# Altium PCB ASURT_LATCH_PCB.PcbDoc
Units mm, origin at the board's own origin, x right, y up, seen from the top; angles counter-clockwise.
Board outline 62.95 x 72.9 mm, 2 copper layers (Top Layer, Bottom Layer); 62 components, 49 nets, 220 pads, 83 vias.
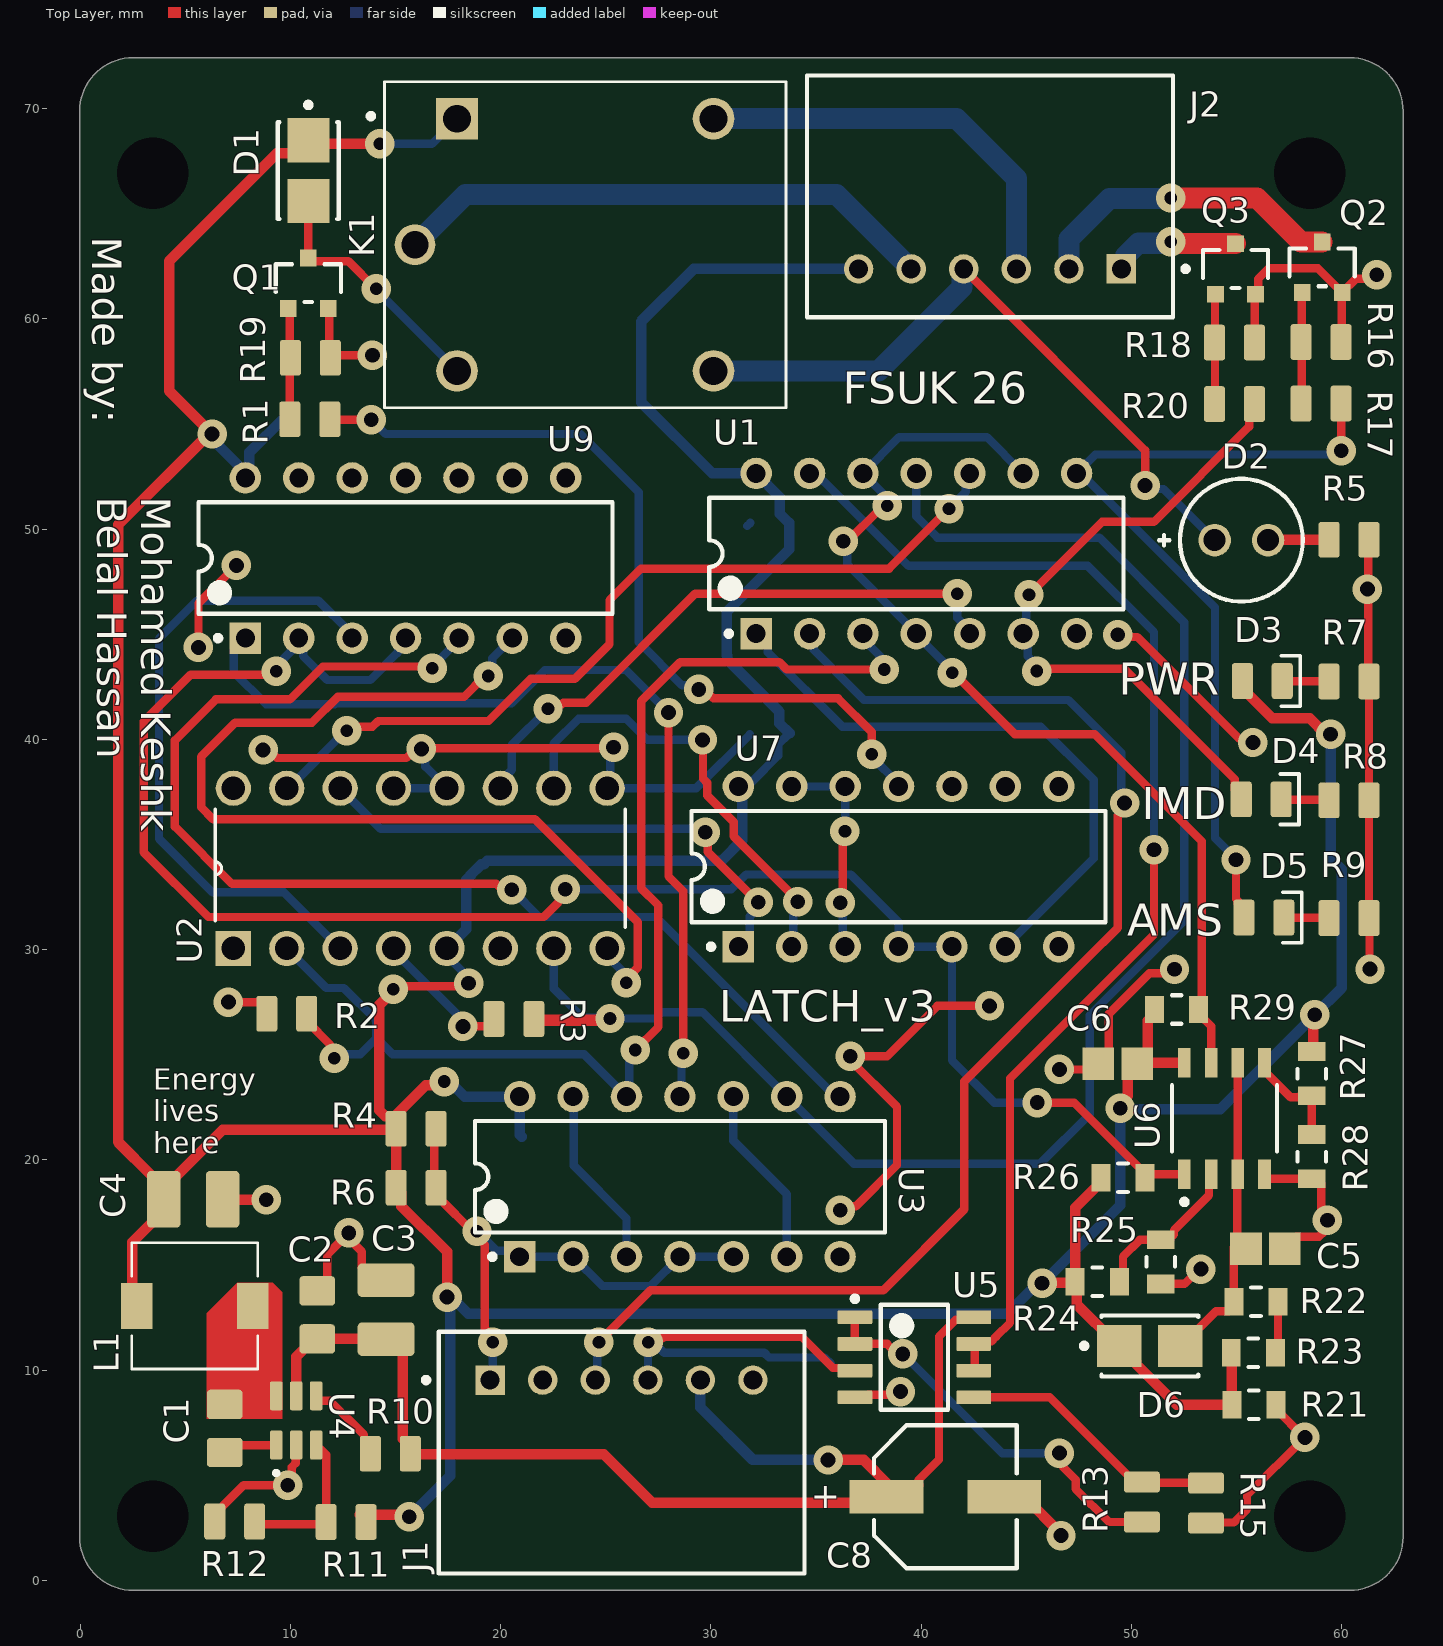
[diagram p0: Top Layer view]
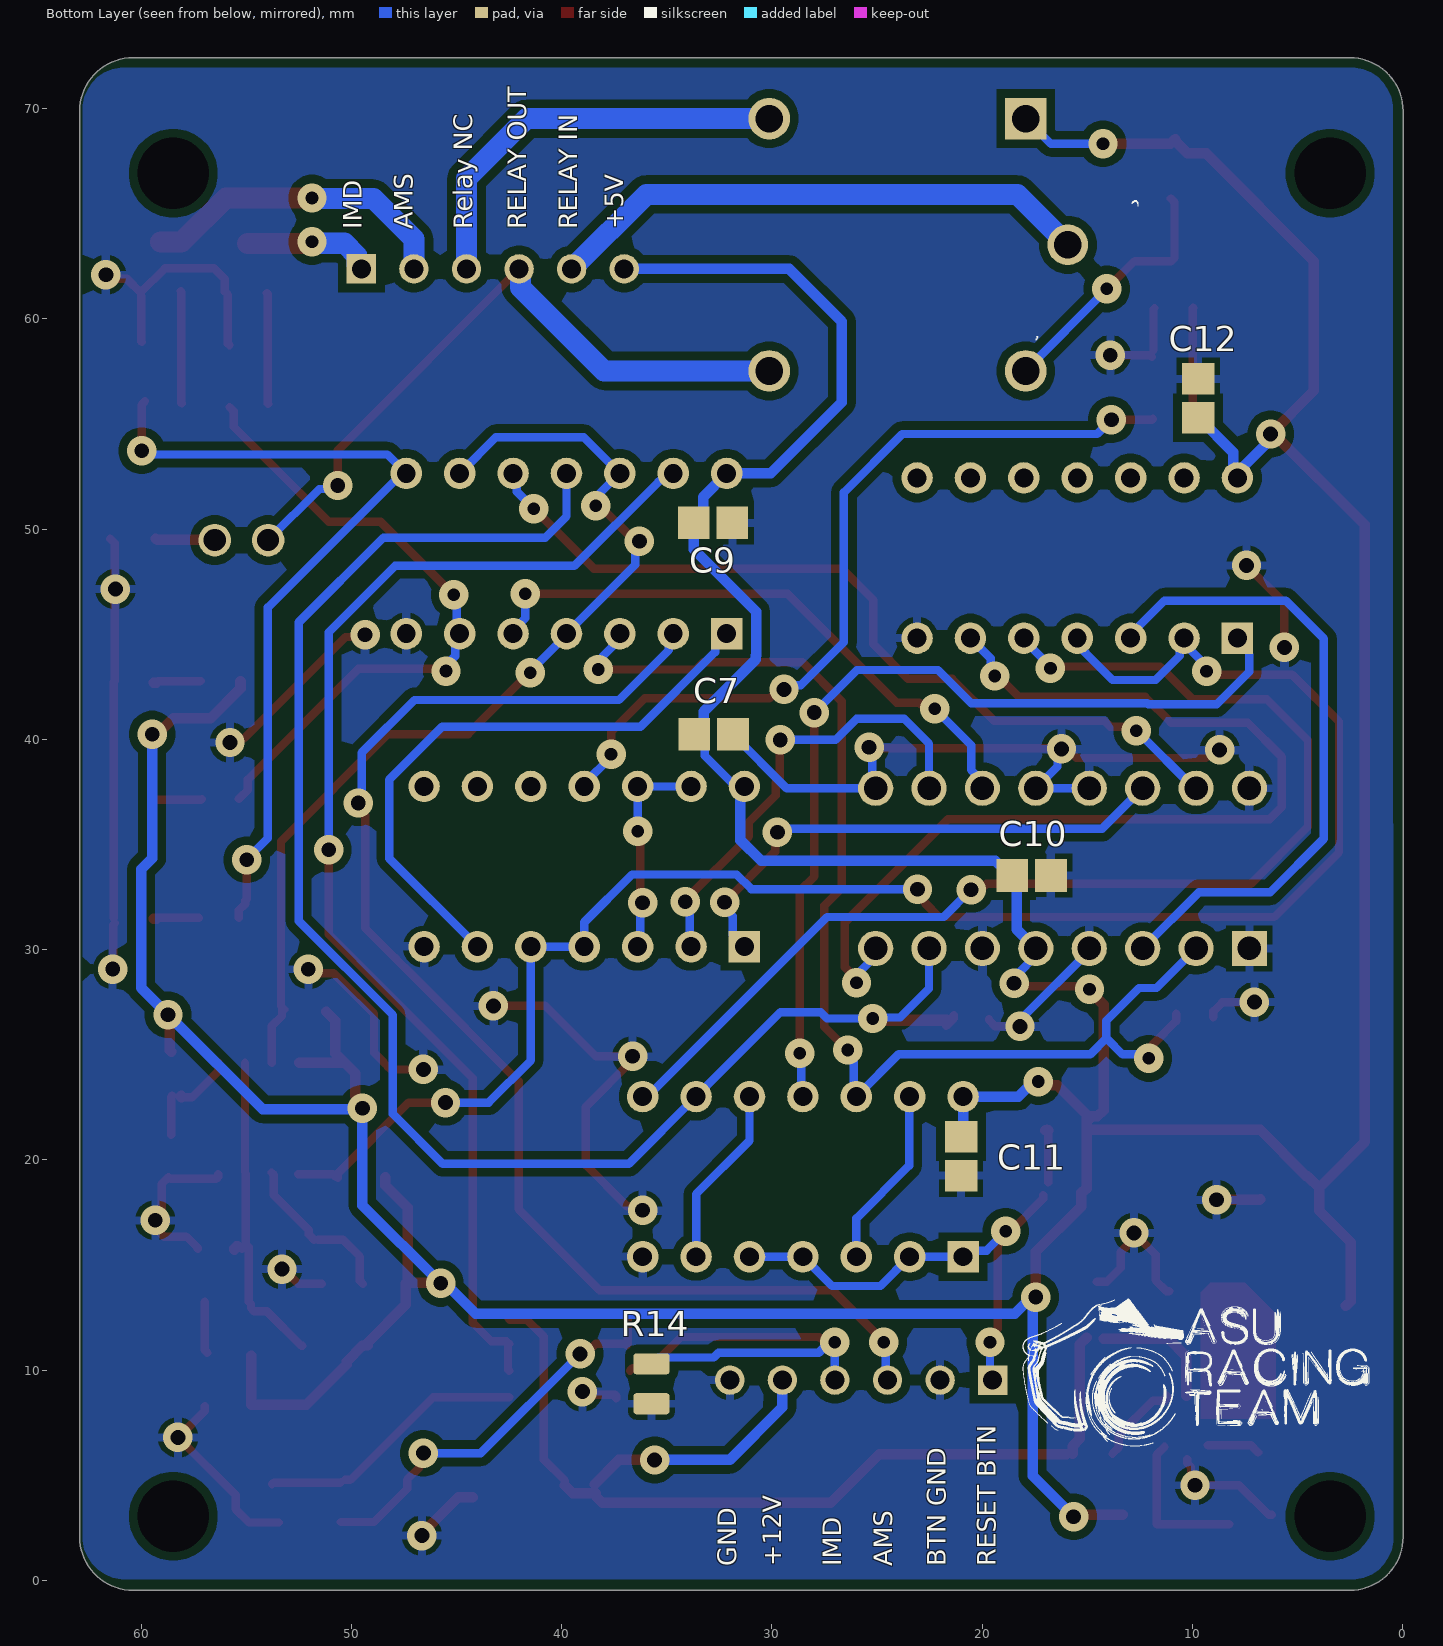
[diagram p1: Bottom Layer view, seen from below]
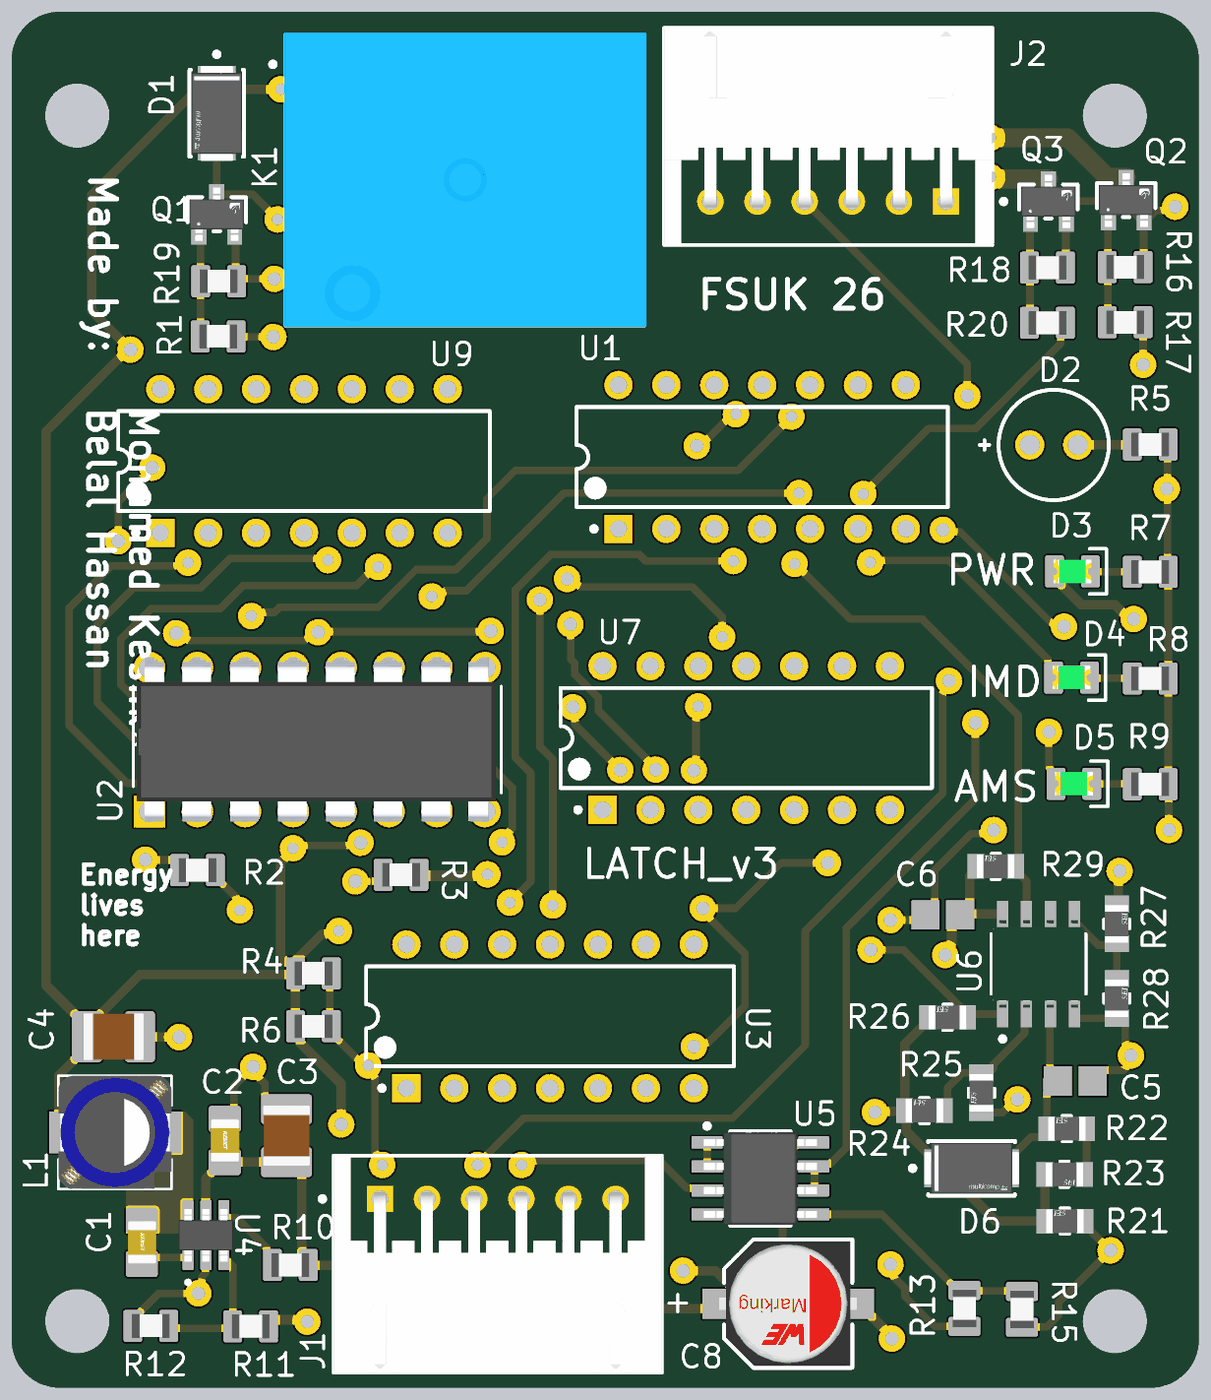
[diagram p2: 3D render of the assembled board from above, using the file's embedded part models]

## Layer stack, top to bottom
Top Solder: solder mask 0.0102, Solder Resist, Dk 3.5
Top Layer: signal copper 0.0356
Dielectric 1: dielectric 0.32, FR-4, Dk 4.8
Bottom Layer: signal copper 0.0356
Bottom Solder: solder mask 0.0102, Solder Resist, Dk 3.5

## Board outline
-0.025,2.065 -0.025,69.885 cw(c2.515,69.885) 2.515,72.425 60.385,72.425 cw(c60.385,69.885) 62.925,69.885 62.925,2.065 cw(c60.385,2.065) 60.385,-0.475 2.515,-0.475 cw(c2.515,2.065)

## Design rules (kind name [scope] priority, off if disabled: settings)
Clearance "Stitching GND" [IsStitchingVia and InNet('GND') vs (IsVia and (Not IsStitchingVia)) Or IsPad] p1: gap=0.127 ignorepadtopadclearanceinfootprint=FALSE
Clearance [All] p2: gap=0.4 ignorepadtopadclearanceinfootprint=TRUE except(0.2: Arc-Region Arc-Text Track-Region Track-Text SMDPad-Region SMDPad-Text THPad-Region THPad-Text Via-Region Via-Text Fill-Region Fill-Text Poly-Region Poly-Text Region-Region Region-Text Text-Text)
HoleSize [All] p1: absolutevalues=TRUE maxlimit=5 minlimit=0.025 maxpercent=80.000 minpercent=20.000
PlaneConnect [All] p1: planeconnectstyle=Relief reliefexpansion=0.508 reliefentries=4 reliefconductorwidth=0.4 reliefairgap=0.254
PolygonConnect [All] p1: connectstyle=Relief reliefconductorwidth=0.4 reliefentries=4 polygonreliefangle="90 Angle" airgapwidth=0.254
RoutingVias [All] p1: holewidth=0.6 width=1.4 viastyle="Through Hole" minholewidth=0.6 minwidth=1.4 maxholewidth=6.3 maxwidth=2
SolderMaskExpansion [All] p1: expansion=0.102 istentingtop=FALSE
SupplyNets "Schematic Supply Nets_3" [InNet('+5V')] p1: voltage=0.000
SupplyNets "Schematic Supply Nets" [InNet('GND')] p2: voltage=0.000
Width [All] p1: maxlimit=1 minlimit=0.4 preferedwidth=0.5 minimp=50.000000 maximp=50.000000 favimp=50.000000
28 further rules are at their usual default settings.

## Components (designator, comment, footprint, x,y, rotation, side; value= is the part's Value field where it differs from the comment)
C1 "22nF" CAP_0805 6.875,7.225 r270 top
C2 "0.1uF" CAP_0805 11.275,12.625 r270 top
C3 "22uF" CAP_1210 14.55,12.875 r270 top
C4 "22uF" CAP_1210 5.375,18.125 r180 top
C5 "22uF" CAPC2013X145X48ML20T23 56.375,15.775 r180 top
C6 "100n" CAPC2013X145X48ML20T23 49.35,24.575 r180 top
C7 "100n" CAPC2013X145X48ML20T23 32.775,40.25 r180 bottom
C8 "865080343009" WCAP-ASLI_D6.3H5.5 41.15,3.975 r180 top
C9 "100n" CAPC2013X145X48ML20T23 32.8,50.3 r180 bottom
C10 "100n" CAPC2013X145X48ML20T23 17.65,33.525 r0 bottom
C11 "100n" CAPC2013X145X48ML20T23 21,20.175 r270 bottom
C12 "100n" CAPC2013X145X48ML20T23 9.725,56.225 r90 bottom
D1 "1N4007 SMD" FP-1N4007_SMD-IPC_C 10.85,67.05 r270 top
D2 "HLMP-4740" AVAG-HLMP-4740 55.23,49.475 r0 top
D3 "GREEN" LED_0805_GREEN 56.225,42.775 r180 top
D4 "GREEN" LED_0805_GREEN 56.175,37.15 r180 top
D5 "GREEN" LED_0805_GREEN 56.3,31.525 r180 top
D6 "1N4007 SMD" FP-1N4007_SMD-IPC_C 50.875,11.15 r0 top
J1 "S6B-XH-A (LF)(SN)" FP-S6B-XH-A_LF_SN-MFG 25.75,6.075 r180 top
J2 "S6B-XH-A (LF)(SN)" FP-S6B-XH-A_LF_SN-MFG 43.275,65.825 r0 top
K1 "SRD-05VDC-SL-C" RELAY_SRD-05VDC-SL-C 24.025,63.525 r0 top
L1 "10uH" "PCBComponent_1 - duplicate1" 0.37,13.939 r180 top
Q1 "AO3400A" FP-SOT23-MFG 10.85,61.7 r90 top
Q2 "AO3400A" FP-SOT23-MFG 59.075,62.45 r90 top
Q3 "AO3400A" FP-SOT23-MFG 54.95,62.375 r90 top
R1 "100" RES_0805 10.925,55.225 r180 top
R2 "47K" RES_0805 9.825,26.95 r0 top
R3 "47K" RES_0805 20.625,26.7 r180 top
R4 "10K" RES_0805 15.975,21.475 r0 top
R5 "470" RES_0805 60.35,49.5 r180 top
R6 "10K" RES_0805 15.975,18.675 r0 top
R7 "470" RES_0805 60.35,42.75 r180 top
R8 "220" RES_0805 60.35,37.1 r180 top
R9 "220" RES_0805 60.35,31.5 r180 top
R10 "10k" RES_0805 14.75,6.025 r0 top
R11 "110k" RES_0805 12.65,2.775 r180 top
R12 "15k" RES_0805 7.35,2.8 r180 top
R13 "10k" RES_0805 50.5,3.725 r270 top
R14 "2.2k" RES_0805 35.725,9.35 r90 bottom
R15 "10k" RES_0805 53.55,3.675 r90 top
R16 "10k" RES_0805 59.025,58.9 r180 top
R17 "100" RES_0805 59.025,55.975 r180 top
R18 "10k" RES_0805 54.9,58.875 r180 top
R19 "10k" RES_0805 10.95,58.15 r180 top
R20 "100" RES_0805 54.9,55.95 r180 top
R21 "10k" FP-RMCF0805-MFG 55.825,8.35 r180 top
R22 "43k" FP-RMCF0805-MFG 55.925,13.25 r180 top
R23 "110k" FP-RMCF0805-MFG 55.8,10.825 r0 top
R24 "15k" FP-RMCF0805-MFG 48.375,14.2 r180 top
R25 "3k" FP-RMCF0805-MFG 51.4,15.15 r270 top
R26 "10k" FP-RMCF0805-MFG 49.6,19.15 r180 top
R27 "110k" FP-RMCF0805-MFG 58.575,24.1 r90 top
R28 "110k" FP-RMCF0805-MFG 58.575,20.15 r90 top
R29 "10k" FP-RMCF0805-MFG 52.15,27.15 r180 top
U1 "SN74HC32" N0014A 39.77,48.84 r90 top
U2 "M74HC76" PCBComponent_1 22.859,41.758 r0 top
U3 "74HC00N" NXP-SOT27-1-14 28.525,19.2 r90 top
U4 "" "PCBComponent_1 - duplicate" 9.767,17.384 r90 top
U5 "TLV2372IDR" D0008A_M 39.675,10.61 r0 top
U6 "LM393D" FP-SO8-MFG 54.425,21.975 r90 top
U7 "74HC00N" N0014A 38.925,33.95 r90 top
U9 "SN74HC08N" N0014A 15.475,48.625 r90 top

## Footprints (in the part's own frame and the unit in brackets; to place one, negate y for a bottom-side part, rotate by r counter-clockwise, add the part's x,y. Pads: shape width x height; smd on the part's side, far side on the other; paste and mask are expansions set on the pad)
AVAG-HLMP-4740 [mm] "THD, 2-Leads, Dia 5.845mm, Pitch 2.54mm"
  round 1.55 hole 1.05: 1(-1.27,0) 2(1.27,0)
  silkscreen extent -3.92,-2.92 2.92,2.92
CAP_0805 [mm]
  rrect25% 1.4x1.7 smd: 1(-1.143,0) 2(1.143,0)
  body extent -1.15,-0.76 1.15,0.79, height 1.01
CAP_1210 [mm]
  rrect25% 1.6x2.7 smd: 1(-1.4,0) 2(1.4,0)
  body extent -1.6,-1.25 1.6,1.25, height 2.5
CAPC2013X145X48ML20T23 [mm] "Chip Capacitor, 2-Leads, Body 2.00x1.25mm, IPC Low Density"
  rect 1.5x1.55 smd: 1(-0.925,0) 2(0.925,0)
  body extent -1.1,-0.72 1.1,0.72, height 1.45
D0008A_M [mm] "SOIC, 8-Leads, Body 5x4mm, Pitch 1.27mm, IPC Low Density"
  rrect15% 1.65x0.65 smd: 1(-2.825,1.905) 2(-2.825,0.635) 3(-2.825,-0.635) 4(-2.825,-1.905) 5(2.825,-1.905) 6(2.825,-0.635) 7(2.825,0.635) 8(2.825,1.905)
  silkscreen extent -2.95,-2.5 1.6,2.9, body extent -3,-2.45 3,2.45, height 1.63
FP-1N4007_SMD-IPC_C [mm]
  rect 2.1x2 smd paste+0 mask+0: 1(-1.45,0) 2(1.45,0)
  silkscreen extent -3.25,-1.45 2.3,1.45, body extent -2.6,-1.55 2.6,1.55, height 0.25
FP-RMCF0805-MFG [mm]
  rect 0.9x1.3 smd paste+0 mask+0: 1(-1.05,0) 2(1.05,0)
  silkscreen extent -0.23,-0.67 0.23,0.67, body extent -1.6,-0.77 1.6,0.77, height 0.25
FP-S6B-XH-A_LF_SN-MFG [mm]
  rect 1.4x1.4 hole 0.9 paste-2539.97 mask+0: 1(6.25,-3.45)
  round 1.4 hole 0.9 paste-2539.97 mask+0: 2(3.75,-3.45) 3(1.25,-3.45) 4(-1.25,-3.45) 5(-3.75,-3.45) 6(-6.25,-3.45)
  silkscreen extent -8.7,-5.75 9.42,5.75, body extent -8.8,-5.85 8.8,5.85, height 0.25
FP-SO8-MFG [mm]
  rect 1.4x0.6 smd paste+0 mask+0: 1(-2.65,1.905) 2(-2.65,0.635) 3(-2.65,-0.635) 4(-2.65,-1.905) 5(2.65,-1.905) 6(2.65,-0.635) 7(2.65,0.635) 8(2.65,1.905)
  silkscreen extent -4.1,-2.5 1.58,2.5, body extent -3.45,-2.6 3.45,2.6, height 0.25
FP-SOT23-MFG [mm]
  rect 0.8x0.8 smd paste+0 mask+0: 1(-1.2,0.95) 2(-1.2,-0.95) 3(1.2,0)
  silkscreen extent -0.9,-1.55 0.9,1.55, body extent -1.7,-1.78 1.7,1.78, height 0.25
LED_0805_GREEN [mm]
  rrect25% 1x1.7 smd: A(0.95,0) K(-0.95,0)
  silkscreen extent -1.8,-1.2 -0.9,1.2, body extent -1,-0.63 1,0.63, height 1.12
N0014A [mm] "DIP, 14-Leads, Body 19.7x6.6mm, Pitch 2.54mm"
  rect 1.5x1.5 hole 0.9: 1(-3.81,7.62)
  round 1.5 hole 0.9: 2(-3.81,5.08) 3(-3.81,2.54) 4(-3.81,0) 5(-3.81,-2.54) 6(-3.81,-5.08) 7(-3.81,-7.62) 8(3.81,-7.62) 9(3.81,-5.08) 10(3.81,-2.54) 11(3.81,0) 12(3.81,2.54) 13(3.81,5.08) 14(3.81,7.62)
  silkscreen extent -3.93,-9.85 2.65,9.85, body extent -3.95,-9.85 3.95,9.85, height 5.08
NXP-SOT27-1-14 [mm] "DIP, 14-Leads, Body 19.5x6.5mm, Pitch 2.54mm"
  rect 1.5x1.5 hole 0.9: 1(-3.81,7.62)
  round 1.5 hole 0.9: 2(-3.81,5.08) 3(-3.81,2.54) 4(-3.81,0) 5(-3.81,-2.54) 6(-3.81,-5.08) 7(-3.81,-7.62) 8(3.81,-7.62) 9(3.81,-5.08) 10(3.81,-2.54) 11(3.81,0) 12(3.81,2.54) 13(3.81,5.08) 14(3.81,7.62)
  silkscreen extent -3.93,-9.75 2.65,9.75, body extent -3.95,-9.75 3.95,9.75, height 4.2
PCBComponent_1 [mil]
  rect 66x66 hole 44: 1(-613.16,-460.74)
  round 66 hole 44: 2(-513.16,-460.74) 3(-413.16,-460.74) 4(-313.16,-460.74) 5(-213.16,-460.74) 6(-113.16,-460.74) 7(-13.16,-460.74) 8(86.84,-460.74) 9(86.84,-160.74) 10(-13.16,-160.74) 11(-113.16,-160.74) 12(-213.16,-160.74) 13(-313.16,-160.74) 14(-413.16,-160.74) 15(-513.16,-160.74) 16(-613.16,-160.74)
  silkscreen extent -647,-422 121,-200, body extent -640,-501 110,-129, height 146
"PCBComponent_1 - duplicate" [mm]
  rrect25% 1.37x0.59 smd: 1(-10.949,0.442) 2(-10.949,-0.508) 3(-10.949,-1.458) 4(-8.609,-1.458) 5(-8.609,-0.508) 6(-8.609,0.442)
  silkscreen extent -12.38,0.34 -12.18,0.54, body extent -11.18,-1.97 -8.38,0.95, height 1.4
"PCBComponent_1 - duplicate1" [mm]
  rect 1.5x2.2 smd: 1(-7.83,0.889) 2(-2.33,0.889)
  silkscreen extent -8.08,-2.11 -2.08,3.89, body extent -8.08,-2.11 -2.08,3.89, height 3
RELAY_SRD-05VDC-SL-C [mm]
  rect 1.98x1.98 / inner round 1.98 / far side rect 1.98x1.98 hole 1.32: A1(-6.1,6)
  round 1.98 hole 1.32: A2(-6.1,-6) NC(6.1,6) NO(6.1,-6)
  round 1.935 hole 1.29: COM(-8.1,0)
  silkscreen extent -10.3,-7.75 9.55,7.75, body extent -9.6,-7.8 9.6,7.8, height 15.8
RES_0805 [mm]
  rrect25% 1x1.7 smd: 1(-0.95,0) 2(0.95,0)
  body extent -1,-0.63 1,0.63, height 0.47
WCAP-ASLI_D6.3H5.5 [mm] "Aluminium Electrolytic V-Chip SMT Capacitors, 6.3x5.5mm"
  rect 3.5x1.6 smd: 1(2.8,0) 2(-2.8,0)
  silkscreen extent -3.4,-3.4 3.4,3.4, body extent -3.65,-3.3 3.65,3.3, height 5.5

## Part data
C1 C2: library part CAP_0805, "Capacitor SMD 0805"
C3 C4: library part CAP_1210, "Capacitor SMD 1210"
C5 C6 C7 C9 C10 C11 C12: library part CMP-2007-03205-1, Manufacturer=Vitramon, Part Number=VJ0805Y682KXAMT
C8: library part CMP-03913-53914574-2, "Alum. Electrolytic Cap 100UF 16V 6.3MMV-CHIP Wcap-asli, Lifetime 2000H +105OC", Capacitance=100µF, Case/Package=Radial, ESR (Equivalent Series Resistance)=399.422mΩ, Insulation Resistance=1MΩ, Leakage Current=16µA, Max Operating Temperature=105°C, Min Operating Temperature=-55°C, Ripple Current=255mA, Tolerance=20%, Voltage Rating=16V, Diameter=6.3mm, Height=5.5mm, Height - Seated (Max)=5.5118mm, Impedance=520mΩ, Lead Free="Lead Free", Length=5.5mm, Life (Hours)=2000hours, Mount="Surface Mount", Polarity=Polar, REACH SVHC=Unknown, Ripple Current (AC)=255mA, RoHS=Compliant, Voltage Rating (DC)=16V, Width=6.6mm
D1 D6: library part CMP-12389-000001-1, "Rectifier, 1Kv, 1A, Do-214Ac Rohs Compliant: Yes"
D2: library part CMP-2000-06413-1, "T-1 3/4 (5 mm) Low Current LED Lamp, Green, 1.9 V, -20 to 100 degC, 2-Pin THD, RoHS, Bulk", Color=Green, Dominant Wavelength/Color Temperature=569nm, Manufacturer=AvagoTechnologies, Package=2T-13/4, Package Description="2-Pin Through Hole Device, Dia 5.845 mm, Pitch 2.54 mm", Category=LEDs, Datasheet URL=http://docs.avagotech.com/docs/AV02-1557EN, Datasheet Version=07/2014, Intensity=2.3mcd, Lens Appearance=ColoredDiffused, Lens Shape Type=Circular, Manufacturer URL=http://www.avagotech.com/, Mounting=ThroughHole, Mounting Orientation=TopMount, Mounting Technology=ThroughHole, Number of LEDs=1, Package Reference=HLMP-4740, Packaging=Bulk, Peak Wavelength=565nm, Pin Count=2, Rad Hard=No, Type=Uni-Color, Viewing Angle=50°
D3 D4 D5: library part LED_0805_GREEN, "LED 0805 GREEN SMD"
J1 J2: library part CMP-17439-000165-2, "CONN HEADER R/A 6POS 2.5MM", Color=Natural, Contact Resistance=20mR, Current Rating=3A, Flammability Rating="UL94 V-0", Housing Color=White, Insulation Resistance=1GR, Max Operating Temperature=85°C, Max Voltage Rating (AC)=250V, Min Operating Temperature=-25°C, Package Quantity=500, Connector Type=Header, Contact Finish - Mating=TIN, Contact Material=Brass, Contact Plating=Tin, Contact Shape=Square, Contact Type="Male Pin", Depth=11.5mm, Fastening Type=Detent, Gender=Male, Housing Material=Polyamide, Insulation Color=Natural, Insulation Material=Nylon, Lead Free="Lead Free", Lead Pitch=2.5mm, Length=17.4mm, Max Current Rating=3A, Mount="Through Hole", Number of Contacts=6, Number of Positions=6, Number of Rows=1, Orientation="Right Angle", Packaging=Bulk, Pitch=2.5mm, REACH SVHC="No SVHC", Series=XH, Termination=Solder, Voltage Rating=250V, Voltage Rating (AC)=250V, Wire/Cable Gauge=22AWG
K1: "5V Trigger Relay Module For Arduino And Raspberry Pi 5V Trigger Relay Module For Arduino And Raspberry Pi", Package="NON STANDARD-5 Songle Relay", Availability="Not in stock", Check_prices=https://www.snapeda.com/parts/SRD-05VDC-SL-C/Songle+Relay/view-part/?ref=eda, MF="Songle Relay", MP=SRD-05VDC-SL-C, Price=None, SnapEDA_Link=https://www.snapeda.com/parts/SRD-05VDC-SL-C/Songle+Relay/view-part/?ref=snap
L1: library part "10uH INDUCTOR"
Q1 Q2 Q3: library part CMP-83955-000006-1, "MOSFET N-CH 30V 5.7A SOT23", Case/Package=SOT-23, Continuous Drain Current (ID)=5.7A, Drain to Source Voltage (Vdss)=30V, Gate to Source Voltage (Vgs)=12V, Input Capacitance=630pF, Max Operating Temperature=150°C, Max Power Dissipation=1.4W, Min Operating Temperature=-55°C, Lead Free="Lead Free", Mount="Surface Mount", Number of Elements=1, Number of Pins=3, Packaging="Tape and Reel", Power Dissipation=1.4W, Radiation Hardening=No, Rds On Max=26.5mR
R1 R2 R3 R4 R5 R6 R7 R8 R9 R10 R11 R12 R13 R14 R15 R16 R17 R18 R19 R20: library part RES_0805, "Resistor SMD 0805"
R21 R22 R23 R24 R25 R26 R27 R28 R29: library part CMP-26527-003091-1, "33kΩ ±5% 0.125W 0805 Thick Film Chip Resistor AEC-Q200 compliant", Case/Package=0805, Max Operating Temperature=155°C, Max Power Dissipation=125mW, Min Operating Temperature=-55°C, Package Quantity=10000, Resistance=33kR, Resistor Type="Thick Film", Temperature Coefficient=200ppm/°C, Tolerance=5%, Contact Plating=Tin, Features="Automotive AEC-Q200", Height=0.026inch, Length=0.079inch, Mount="Surface Mount", Number of Terminations=2, Packaging="Tape and Reel", Radiation Hardening=No, RoHS Compliant=Yes, Series=RMCF, Width=0.049inch
U1: library part CMP-1573-00140-3, "Quad 2-input positive-OR gates, N0014A, TUBE", F @ Nom Voltage(Max)(Mhz)=100, Generic Part Number=SN7432, ICC @ Nom Voltage(Max)(mA)=0.038, Manufacturer="Texas Instruments", Operating Temperature Range(C)="0 to 70", Rating=Catalog, tpd @ Nom Voltage(Max)(ns)=22, Voltage(Nom)(V)=5, Bits(#)=4, Code_JEDEC=MS-001, DatasheetVersion=SDLS100, Input Type=TTL, Output Drive (IOL/IOH)(Max)(mA)=0.8/-16, Output Type=TTL, PackageReference=N0014A, PackageVersion=http://www.ti.com/lit/ml/mpdi002c/mpdi002c.pdf, VCC(Max)(V)=5.25, VCC(Min)(V)=4.75
U2: "dual J-K flip-flop with preset and clear"
U3: library part CMP-0976-00001-1, "Quad 2-input NAND gate, CMOS, 2 to 6 V, -40 to 125 degC, 14-Pin DIP (SOT27-1), RoHS, Bulk", Manufacturer="NXP Semiconductors", Temperature Range="-40 to 125 degC", ComponentLink1Description="Manufacturer URL", ComponentLink1URL=http://www.nxp.com/, ComponentLink2Description=Datasheet, ComponentLink2URL=http://www.nxp.com/documents/data_sheet/74HC_HCT00.pdf, ComponentLink3Description="Package Specification", ComponentLink3URL=http://www.nxp.com/documents/outline_drawing/sot027-1_po.pdf, DatasheetVersion="Rev. 6", fmax (MHz)=36, Input levels=CMOS, Mounting Technology="Through Hole", Nr of bits=4, Output drive capability (mA)="+/- 5.2", PackageDescription="14-Pin plastic dual in-line package, Body 19.025 x 6.34 mm, Pitch 2.54 mm", PackageReference=SOT27-1, PackageVersion=Feb-03, Packing=Bulk, PartNumber=74HC00N, RoHS=TRUE, tpd (ns)=7, VCC (V)="2 to 6"
U4: library part MT2492, "DC-DC step-down converter (buck converter)"
U5: library part CMP-0272-02948-3, "550 uA/Ch, 3 MHz, RRIO Operational Amplifier, 2.7 to 16 V, -40 to 125 degC, 8-pin SOIC (D8), Green (RoHS & no Sb/Br)", Manufacturer="Texas Instruments", Rating=Catalog, Total Supply Voltage(Max)(+5V is 5, +/-5V is 10)=16, Total Supply Voltage(Min)(+5V is 5, +/-5V is 10)=2.7, CMRR(Min)(dB)=50, Code_JEDEC=MS-012, ComponentLink1Description="Manufacturer URL", ComponentLink1URL=http://www.ti.com/, ComponentLink2Description=Datasheet, ComponentLink2URL=http://www.ti.com/lit/ds/symlink/tlv2372.pdf, ComponentLink3Description="Package Specification", ComponentLink3URL=http://www.ti.com/litv/pdf/msoi002j, DatasheetVersion=SLOS270D, Eco-Plan="Green (RoHS & no Sb/Br)", GBW(Typ)(MHz)=3, IIB(Max)(pA)=60, Iq per channel(Max)(mA)=0.9, Mounting Technology="Surface Mount", Number of Channels=2, Offset Drift(Typ)(uV/C)=2, PackageDescription="8-Pin Plastic Small Outline, Body 4.9 x 3.9 mm, Pitch 1.27 mm", PackageReference=D0008A, PackageVersion="4040047-3/M, 06/2011", Packing="LARGE T&R", PartNumber=TLV2372IDR, Slew Rate(Typ)(V/us)=2.4, Sub Family="Low Supply Voltage Amplifier (<=2.7V), Precision Amplifier", Vio (25C)(Max)(mV)=4.5
U6: library part CMP-12132-000003-1, "IC VOLT COMPARATOR DUAL LP 8SOIC", Ambient Temperature Range High=+70°C, Ambient Temperature Range Low=0°C, Input Bias Current=0.02uA, Input Offset Voltage=1mV, Manufacturer=STMicroelectronics, Max Dual Supply Voltage=18V, Max Junction Temp=+150°C, Max Supply Voltage=36V, Min Dual Supply Voltage=1V, Min Supply Voltage=2V, Nominal Supply Current=0.45-0.6mA, Output Current Per Channel=18mA, Package=SO8, Temperature="0°C to +70°C", Voltage Gain=200V/mV, Automotive=No, Category=IC, ComponentLink2Description=Datasheet, ComponentLink2URL=https://www.st.com/resource/en/datasheet/lm393.pdf, Device Class L1="Integrated Circuits (ICs)", Device Class L2="Linear ICs", Device Class L3=Comparators, Digikey Description="IC VOLT COMPARATOR DUAL LP 8SOIC", Footprint Url=https://www.st.com/resource/en/datasheet/stm8l001j3.pdf, Height=1.75mm, Lead Free=Yes, Manufacturer Part Number=LM393D, Mouser Description="Analog Comparators Lo-Pwr Dual Voltage", Number of Channels=2, Octopart=https://octopart.com/lm393d-stmicroelectronics-25832, Response Time=1.3us, RoHS=TRUE, Standoff Height=0.1mm, Temperature Range High=+70°C, Temperature Range Low=0°C
U7: library part CMP-1627-00501-2, "Quad 2-input positive-NAND gates, N0014A, TUBE", F @ Nom Voltage(Max)(Mhz)=75, Generic Part Number=SN7400, ICC @ Nom Voltage(Max)(mA)=0.022, Manufacturer="Texas Instruments", Operating Temperature Range(C)="0 to 70", Rating=Catalog, tpd @ Nom Voltage(Max)(ns)=22, Voltage(Nom)(V)=5, Bits(#)=4, Code_JEDEC=MS-001, DatasheetVersion=SDLS025B, Input Type=TTL, Output Drive (IOL/IOH)(Max)(mA)=0.4/-16, Output Type=TTL, PackageReference=N0014A, Schmitt Trigger=No, Technology Family=TTL, VCC(Max)(V)=5.25, VCC(Min)(V)=4.75
U9: library part CMP-0777-00282-3, "Quad 2-input positive-AND gates, N0014A, TUBE", F @ Nom Voltage(Max)(Mhz)=50, Generic Part Number=SN74S08, ICC @ Nom Voltage(Max)(mA)=0.032, Manufacturer="Texas Instruments", Operating Temperature Range(C)="0 to 70", Rating=Catalog, tpd @ Nom Voltage(Max)(ns)=7.5, Voltage(Nom)(V)=5, Bits(#)=4, DatasheetVersion=SDLS033, Input Type=TTL, Output Drive (IOL/IOH)(Max)(mA)=-24/24, Output Type=TTL, PackageReference=N0014A, Schmitt Trigger=No, Technology Family=S, VCC(Max)(V)=5.25, VCC(Min)(V)=4.75

## Free pads (board coordinates)
  round 1.524 hole 3.4 unplated: 1(3.45,66.925) 2(58.475,66.925) 3(58.475,3.05) 4(3.45,3.05)

## Via types
v1: diameter 1.4, hole 0.7, Top Layer to Bottom Layer, 35 vias
v2: diameter 1.4, hole 0.6, Top Layer to Bottom Layer, 29 vias
v3: diameter 1.4, hole 0.711, Top Layer to Bottom Layer, 19 vias

## Nets (pads, with @x,y where several pads share a name; then routed paths per layer and width w, separated by ;. In a path a pad name is that pad's centre, name@x,y a point inside that pad or via, vN(x,y) a via of type N, cw(c..) or ccw(c..) an arc to the next point about the centre after c; other vN are vias at no path point)
+5V: C4.2 C6.1 C7.1 C9.1 C10.2 C11.1 C12.1 D1.1 D3.A D6.1 J2.6 K1.A1 L1.2 R4.1 R6.1 R11.1 R21.2 R23.1 R24.2 R26.2 R27.2 R29.2 U1.14 U2.5 U3.14 U6.8 U7.14 U9.14 | length 293.5
  Top Layer w0.4: v2@14.9,28.117 15.038,28.255 18.28,28.255 v3@18.5,28.475
  Top Layer w0.5: L1.2 2.475,13.275 2.475,16.075 3.975,17.575 C4.2@3.975,18.675 ; D1.1@10.825,68.55 11.05,68.325 v2(14.25,68.325) ; D1.1 10.218,67.868 9.343,67.868 4.225,62.75 4.225,56.575 v3(6.275,54.525) 6.125,54.525 1.8,50.2 1.8,20.85 3.425,19.225 C4.2@3.975,18.675 ; R11.1@13.3,3.125 15.294,3.125 15.5,2.919 v1@15.5,2.9 ; R4.1@14.862,21.987 14.775,22.075 14.518,22.075 14.225,22.368 14.225,27.368 14.894,28.036 v2(14.894,28.11) v2@14.9,28.117 ; R4.1@14.9,21.375 14.85,21.425 6.775,21.425 4.575,19.225 4.525,19.225 C4.2@3.975,18.675 ; R6.1@15.025,18.625 R4.1 15.025,21.891 15.025,22.15 16.428,23.553 17.153,23.553 v2(17.325,23.725) ; R6.1 15.275,18.425 15.275,17.8 17.45,15.625 v1(17.45,13.475) ; v1(45.75,14.125) 45.788,14.162 47.237,14.162 R24.2@47.263,14.137 ; R26.2@48.4,19.175 48.4,18.8 47.325,17.725 R24.2 47.405,14.12 47.405,13.12 49.225,11.3 D6.1@49.225,11.175 ; D6.1 49.475,11.15 50.225,10.4 50.225,10.281 50.625,9.881 52.156,8.35 R21.2 54.763,8.362 54.763,10.663 R23.1@54.775,10.675 ; v1(49.475,22.45) 49.475,22.694 49.825,23.044 49.825,24.125 C6.1 ; R29.2@51.2,27.05 50.775,26.625 50.775,25.075 50.325,24.625 U6.8@52.475,24.625 ; D3.A 55.275,42.425 56.7,41 58.481,41 59.231,40.25 v1(59.475,40.25) ; R27.2 58.65,25.225 58.65,26.75 v1@58.7,26.8
  Bottom Layer w0.4: v2(14.25,68.325) 16.725,68.325 K1.A1 ; U2.5@17.5,30.05 17.5,29.655 18.284,28.871 18.284,28.591 v3(18.475,28.4) ; U7.14@31.375,37.875 31.47,37.97 31.944,37.97 33.2,39.226 33.2,39.75 C7.1
  Bottom Layer w0.5: v3(6.275,54.525) 6.275,54.281 7.798,52.759 U9.14@7.798,52.377 ; U9.14@7.9,52.4 8.046,52.546 8.046,53.646 9.7,55.3 C12.1 ; v1(15.65,3.025) 17.6,4.975 17.6,12.797 17.597,12.8 v1@17.597,13.328 ; v2(17.325,23.725) 17.569,23.725 18.284,23.01 U3.14 ; U2.5 18.365,30.975 18.365,33.315 C10.2 ; v1(17.45,13.475) v1@17.597,13.328 ; C10.2@18.563,33.537 19.075,34.05 19.187,34.05 19.368,34.231 30.515,34.231 31.496,35.213 31.496,37.569 U7.14 U7.14@31.282,37.782 ; U3.14@20.95,22.85 20.905,22.805 20.905,21.195 C11.1 ; C9.1@33.625,50.375 33.275,50.725 33.275,51.525 U1.14 30.059,52.65 26.675,56.034 26.675,59.875 29.175,62.375 J2.6 ; C9.1 33.725,49.05 30.75,46.075 30.75,44.011 30.775,43.986 30.775,43.8 33.25,41.325 33.25,40.775 C7.1@33.737,40.288 ; v1@45.675,14.125 45.542,14.125 44.092,12.675 18.458,12.675 17.806,13.328 v1@17.597,13.328 ; v1(45.75,14.125) 49.475,17.85 v1(49.475,22.45) 49.525,22.4 54.225,22.4 58.55,26.725 v1@58.725,26.725 ; v1(58.725,26.9) 60,28.175 60,33.828 59.475,34.353 v1(59.475,40.25)
+12V: C2.2 C3.2 C8.1 J1.5 R10.2 U4.5 U5.8 | length 58.3
  Top Layer w0.4: C8.1@39.85,4.525 39.85,4.743 40.85,5.743 40.85,11.6 41.64,12.39 42.375,12.39 U5.8@42.439,12.454
  Top Layer w0.5: U4.5 10.28,8.78 10.28,10.637 11.125,11.482 C3.2@14.218,11.482 ; C3.2@15.025,11.55 15.35,11.225 15.35,6.725 15.7,6.375 R10.2 ; R10.2@16,6 24.9,6 27.2,3.7 38.075,3.7 C8.1 ; v3(35.575,5.725) 37.275,5.725 C8.1@38.421,4.579 ; C8.1@38.375,4.15 39.475,4.15 C8.1@39.85,4.525 ; U5.8@42.439,12.454 U5.8
  Bottom Layer w0.5: J1.5 29.5,8.225 32,5.725 v3@35.6,5.725
AMS_!Q: U2.14 U7.1 | length 25.1
  Top Layer w0.4: v1(29.736,35.581) 29.847,35.471 29.847,34.653 v1(32.25,32.25)
  Bottom Layer w0.4: U2.14 14.29,35.75 29.567,35.75 v1(29.736,35.581) ; U7.1 31.855,30.69 31.855,31.584 32.225,31.954 v1@32.225,32.2
AMS_IN: J1.3 U1.2 | length 64.3
  Top Layer w0.4: v2(24.675,11.325) 24.675,11.35 27.125,13.8 38.2,13.8 42.05,17.65 42.05,23.736 47.104,28.79 47.895,29.581 49.35,31.036 49.35,36.379 49.675,36.704 v1(49.675,36.975)
  Bottom Layer w0.4: J1.3 24.588,9.613 24.588,11.237 v2(24.675,11.325) ; U1.2 34.9,44.82 34.9,44.25 37.275,41.875 47,41.875 49.509,39.366 49.509,37.141 v1(49.675,36.975)
AMS_indicator: J2.2 Q2.3 | length 15.2
  Top Layer w1: v2(51.875,65.75) 55.973,65.75 58.073,63.65 Q2.3
  Bottom Layer w1: J2.2 47.025,63.8 48.95,65.725 51.85,65.725 v2(51.875,65.75)
AMS_Q: U1.10 U2.15 | length 40.3
  Top Layer w0.4: v2(12.675,40.413) 12.866,40.605 13.905,40.605 14.175,40.875 19.425,40.875 21.425,42.875 23.525,42.875 25.175,44.525 25.175,46.625 26.675,48.125 38.475,48.125 v2(41.325,50.975)
  Bottom Layer w0.4: U2.15 9.913,37.675 12.651,40.413 v2(12.675,40.413) ; v2(41.325,50.975) 42.13,51.78 42.13,52.53 U1.10@42.225,52.625
AMS_Q_Gated: D5.A R17.1 U1.8 | length 40.6
  Top Layer w0.4: v1(54.975,34.275) 54.975,32.409 55.05,32.334 55.05,32.175 55.35,31.875 D5.A ; v1(59.975,53.725) R17.1@59.975,55.925 ; R17.1@59.825,56.075 R17.1@59.95,55.95 ; R17.1@59.825,56.075 R17.1@59.95,55.95 ; R17.1@59.825,56.075 R17.1@59.975,55.925 ; R17.1@59.825,56.075 R17.1@59.95,55.95 ; R17.1@59.95,55.95 R17.1@59.975,55.925 ; R17.1@59.95,55.95 R17.1@59.975,55.925 ; R17.1@59.95,55.95 R17.1@59.975,55.925
  Bottom Layer w0.4: v1(54.975,34.275) 54.975,34.304 53.975,35.304 53.975,46.275 47.6,52.65 U1.8 47.495,52.755 48.29,53.55 59.565,53.55 59.74,53.725 v1(59.975,53.725)
AMS_REAL: R2.2 U1.3 U2.2 U3.12 | length 58.9
  Top Layer w0.4: R2.2 10.775,26.6 11.884,25.491 11.884,25.016 v2(12.075,24.825) ; v2(26.4,25.225) 27.5,26.325 27.5,32.1 26.681,32.919 26.681,41.813 28.542,43.675 33.258,43.675 33.608,43.325 v2(38.25,43.325)
  Bottom Layer w0.4: U2.2 11.705,28.175 12.537,28.175 14.09,26.621 14.09,25.79 14.855,25.025 23.97,25.025 U3.12@25.879,23.116 ; v2(12.075,24.825) 12.266,25.016 13.316,25.016 14.05,25.75 ; U3.12 25.985,23.222 26.195,23.432 26.113,23.515 26.113,24.668 26.4,24.954 v2(26.4,25.225) ; U1.3 37.23,44.778 38.059,43.949 38.059,43.516 v2(38.25,43.325)
CLR_1: U2.3 U9.3 | length 30.8
  Bottom Layer w0.4: U2.3 9.695,32.725 6.3,32.725 3.75,35.275 3.75,44.791 5.559,46.6 11.325,46.6 12.825,45.1 U9.3@12.825,45.025
CLR_2: U2.8 U9.6 | length 48.1
  Top Layer w0.4: v2(19.4,43.013) 19.242,43.013 18.254,42.025 12.25,42.025 11.025,40.8 7.375,40.8 5.75,39.175 5.75,36.775 6.325,36.2 21.625,36.2 26.525,31.3 26.525,29.159 25.975,28.609 v2(25.975,28.425)
  Bottom Layer w0.4: v2(19.4,43.013) 19.591,43.205 19.591,43.851 U9.6 ; U2.8 25.065,29.71 25.784,28.991 25.784,28.616 v2(25.975,28.425)
CLR_MASK: R26.1 U6.1 U7.4 U7.5 U9.2 U9.4 | length 84.2
  Top Layer w0.4: v2(9.326,43.234) 9.167,43.075 5.25,43.075 3.025,40.85 3.025,34.625 6.075,31.575 6.1,31.55 22.05,31.55 22.706,32.206 22.706,32.235 23.075,32.604 v1(23.075,32.875) ; v1(45.525,22.725) 47.275,22.725 50.65,19.35 R26.1 ; R26.1@50.788,19.212 50.9,19.325 U6.1
  Bottom Layer w0.4: v2(9.326,43.234) 9.326,43.49 10.395,44.559 U9.2 10.605,44.605 10.605,43.97 11.75,42.825 13.8,42.825 15.078,44.103 15.078,44.12 U9.4@15.558,44.6 ; v1(23.075,32.875) 30.975,32.875 31.675,33.575 36.65,33.575 38.925,31.3 U7.4 41.265,30.14 U7.5@41.3,30.175 ; U7.5@41.225,30.1 41.465,29.86 41.465,24.735 43.475,22.725 v1(45.525,22.725)
CLR_MASK_INV: U1.1 U7.6 | length 28.8
  Bottom Layer w0.4: U1.1 32.7,44.48 32.7,44.15 36.25,40.6 45.685,40.6 48.2,38.085 48.2,34.335 U7.6
EXISTING_CLR_1: U3.11 U9.1 | length 43.3
  Top Layer w0.4: v1(27.981,41.275) 27.981,33.484 28.675,32.79 v2(28.675,25.075)
  Bottom Layer w0.4: U9.1 7.305,44.265 7.305,44.036 7.3,44.031 7.3,43.212 8.837,41.675 12.098,41.675 12.137,41.713 20.513,41.713 22.1,43.3 25.956,43.3 v1(27.981,41.275) ; U3.11 28.6,23.085 28.6,25 v2(28.675,25.075)
EXISTING_CLR_2: U3.8 U9.5 | length 56.8
  Top Layer w0.4: v2(16.75,43.375) 16.66,43.465 11.54,43.465 9.975,41.9 6.45,41.9 4.5,39.95 4.5,35.85 7.225,33.125 19.791,33.125 19.874,33.041 20.334,33.041 v1(20.525,32.85)
  Bottom Layer w0.4: v2(16.75,43.375) 16.75,43.463 18.015,44.728 U9.5 ; v1(20.525,32.85) 21.825,31.55 27.375,31.55 35.915,23.01 U3.8
GND: C2.1 C3.1 C4.1 C5.1 C6.2 C7.2 C8.2 C9.2 C10.1 C11.2 C12.2 J1.2 J1.6 Q1.2 Q2.2 Q3.2 R2.1 R3.2 R5.1 R7.1 R8.1 R9.1 R12.2 R14.1 R15.1 R16.1 R18.1 R19.1 R21.1 R25.2 R28.1 U1.7 U2.1 U2.4 U2.6 U2.9 U2.12 U2.13 U2.16 U3.7 U4.2 U5.4 U6.4 U7.7 U9.7 | length 153.3
  Top Layer w0.4: v3(5.625,44.375) 5.625,46.475 v3(7.425,48.275) ; R12.2@6.225,3.125 6.375,3.125 7.775,4.525 v1(9.875,4.525) 10.066,4.716 10.066,5.391 10.25,5.575 U4.2@10.25,5.75 ; v3(7.05,27.5) 7.062,27.488 8.575,27.488 9,27.062 R2.1@9,26.775 ; v3(8.7,39.5) 8.971,39.5 9.357,39.113 15.518,39.113 15.879,39.475 v3@16.1,39.475 ; C2.1@11.1,13.75 11.232,13.75 11.75,14.268 11.75,15.5 v1(12.775,16.525) 12.775,16.254 13.4,15.629 13.4,14.875 14.075,14.2 C3.1@14.55,14.2 ; Q1.2 11.85,60.45 R19.1@11.85,58.5 ; R19.1@11.925,58.2 12,58.275 v1(13.9,58.275) ; v3@16.138,39.612 16.238,39.512 16.313,39.588 25.337,39.588 v3(25.375,39.625) ; v3(18.2,26.35) 19.375,26.35 19.675,26.65 R3.2 ; v1(36.15,17.6) 36.341,17.791 36.891,17.791 38.85,19.75 38.85,22.525 v1@36.6,24.775 ; v1(36.625,24.925) 38.375,24.925 40.775,27.325 v3(43.25,27.325) ; U5.4@37.405,8.65 37.405,8.76 37.475,8.83 38.868,8.83 v3(39.016,8.978) ; v3(46.575,24.3) 48.125,24.3 C6.2@48.3,24.475 ; C6.2@48.45,24.625 48.925,25.1 48.925,26.95 50.852,28.877 51.859,28.877 v1(52.05,29.068) ; v1@49.175,44.975 49.282,44.868 50.282,44.868 55.109,40.041 55.584,40.041 v3(55.775,39.85) ; R25.2 52.525,14.1 v3@53.25,14.825 ; R15.1@53.45,2.75 54.875,2.75 55.5,3.375 55.5,4.05 v3(58.25,6.8) ; R18.1@55.8,58.75 55.875,58.825 55.875,61.15 Q3.2 56.024,61.299 56.024,61.899 56.525,62.4 58.875,62.4 Q2.2 60.684,61.909 61.484,61.909 v1(61.675,62.1) ; U6.4@56.325,19.325 56.325,19.205 56.43,19.1 R28.1 ; R21.1@56.975,8.275 56.975,8.05 v3@58.1,6.925 ; C5.1 57.3,15.8 57.85,16.35 58.925,16.35 v1@59.15,16.575 ; v3@58.125,6.725 v3@58.125,6.8 ; R28.1@58.7,19.175 59.025,18.85 59.025,17.696 59.325,17.396 v1(59.325,17.125) ; R16.1 60,58.925 Q2.2@60,61.075 ; v1(61.225,47.15) 61.263,47.188 61.263,49.338 R5.1@61.475,49.55 ; R9.1@61.25,31.25 61.325,31.175 61.325,29.1 v1(61.35,29.075) ; R9.1 R8.1 R7.1 61.263,42.788 61.263,46.888 v1@61.375,47
  Top Layer w0.5: C4.1 6.8,18.1 v1(8.85,18.1) ; v1@8.875,18.075 v1(8.85,18.1) ; v1@8.875,18.125 v1(8.85,18.1) ; C8.2@44.225,3.95 44.925,3.95 46.65,2.225 v3(46.65,2.125)
  Bottom Layer w0.4: U2.4 14.905,29.937 18.1,26.743 v3@18.1,26.625 ; U2.13 U2.12 16.416,38.704 16.416,39.309 v3@16.35,39.375 ; U2.9@25.125,37.75 25.22,37.845 25.22,39.47 v3(25.375,39.625) ; U2.9@25.275,37.575 25.375,37.675 29.3,37.675 31.85,40.225 C7.2 ; C9.2@31.725,50.15 C9.2
  other v1: 49.35,44.975
  other v3: 53.3,14.8 16.225,39.55
IMD: U1.13 U5.6 U5.7 | length 58.7
  Top Layer w0.4: U5.6 42.55,10.025 42.55,11.195 U5.7 42.625,11.37 43.345,11.37 43.565,11.59 44.225,12.25 44.225,23.875 51.075,30.725 v1(51.075,34.75)
  Bottom Layer w0.4: U1.13 34.988,52.65 35.387,52.25 35.4,52.25 39.4,48.25 47.925,48.25 51.075,45.1 v1(51.075,34.75)
IMD_!Q: U2.10 U7.2 | length 21.9
  Top Layer w0.4: v1(29.6,39.975) 29.625,39.95 29.625,38.134 29.825,37.934 29.825,37.331 31.087,36.069 31.087,35.388 34.125,32.35 v1(34.125,32.275)
  Bottom Layer w0.4: U2.10 22.525,39.8 23.7,40.975 25.975,40.975 26.975,39.975 v1(29.6,39.975) ; U7.2 33.911,30.206 33.911,31.64 33.934,31.663 33.934,32.084 v1(34.125,32.275)
IMD_IN: J1.4 R14.2 U5.3 | length 21.4
  Top Layer w0.4: v2(27.012,11.325) 27.204,11.516 27.688,11.516 27.747,11.575 34.325,11.575 35.8,10.1 36.625,10.1 U5.3@36.75,9.975
  Bottom Layer w0.4: J1.4 27.006,9.531 27.006,11.231 v2@27.075,11.3 ; v2(27.012,11.325) 27.272,11.325 27.772,10.825 32.538,10.825 32.763,10.6 35.4,10.6 R14.2@35.7,10.3
IMD_indicator: J2.1 Q3.3 | length 6.2
  Top Layer w1: v2(51.875,63.675) 51.952,63.598 52.234,63.598 52.258,63.575 Q3.3
  Bottom Layer w1: J2.1 49.725,62.575 49.725,62.989 50.334,63.598 51.798,63.598 v2(51.875,63.675)
IMD_Q: U1.5 U2.11 | length 29.3
  Top Layer w0.4: v2(22.25,41.45) 22.441,41.641 22.876,41.641 22.984,41.75 24.075,41.75 29.25,46.925 v2(41.725,46.925)
  Bottom Layer w0.4: U2.11 19.985,38.008 20.525,38.548 20.525,39.725 v2(22.25,41.45) ; v2(41.725,46.925) 41.725,45.772 U1.5@42.25,45.247 ; U1.5@42.25,45.03 U1.5@42.25,45.247 ; U1.5@42.25,45 U1.5@42.25,45.247 ; U1.5@42.25,45 U1.5@42.25,45.247 ; U1.5@42.25,45 U1.5@42.25,45.247
IMD_Q_Gated: D4.A R20.1 U1.6 | length 32.7
  Top Layer w0.4: v2(45.13,46.873) 48.602,50.345 51.07,50.345 55.6,54.875 55.6,55.6 R20.1@55.8,55.8 ; v2(45.5,43.25) 45.6,43.35 49.675,43.35 54.925,38.1 D4.A@54.925,37.6 ; D4.A@54.925,37.6 D4.A@55.35,37.175 ; D4.A@54.925,37.6 D4.A@55.35,37.175 ; D4.A@54.925,37.6 D4.A@55.35,37.175
  Bottom Layer w0.4: U1.6 44.99,45.17 44.99,46.732 v2(45.13,46.873) ; U1.6@44.975,45.05 45.06,44.965 45.06,43.96 45.5,43.521 v2(45.5,43.25)
IMD_REAL: R3.1 U1.11 U2.7 U3.9 | length 82.2
  Top Layer w0.4: R3.1@21.35,26.875 21.35,26.725 21.7,26.375 R3.1@21.562,26.512 ; R3.1@21.625,26.575 v2@25.25,26.575 ; R3.1@21.65,26.725 v2(25.2,26.725)
  Bottom Layer w0.4: U2.7 22.525,28.146 23.9,26.771 25.154,26.771 v2(25.2,26.725) 27.38,26.725 27.68,27.025 29.59,27.025 U3.9 36.8,19.815 45.662,19.815 48.028,22.181 48.028,26.884 52.506,31.362 52.506,45.569 48.475,49.6 40.775,49.6 39.77,50.605 U1.11
LATCH_OUT: R1.1 U7.11 | length 39.4
  Top Layer w0.4: R1.1@11.888,55.237 R1.1@11.925,55.2 ; v1(13.85,55.2) R1.1@11.925,55.2 ; v1(29.425,42.375) 29.696,42.375 30.121,41.95 36.05,41.95 37.65,40.35 v2(37.65,39.3) ; R1.1@11.875,55.25 R1.1@11.925,55.2 ; R1.1@11.875,55.25 R1.1@11.925,55.2 ; R1.1@11.875,55.25 R1.1@11.925,55.2
  Bottom Layer w0.4: v1(13.85,55.2) 14.525,54.525 23.8,54.525 26.575,51.75 26.575,44.625 28.634,42.566 29.234,42.566 v1(29.425,42.375) ; v2(37.65,39.3) 37.65,39.168 38.925,37.892 U7.11
NetC1_1: C1.1 L1.1 U4.6
NetC1_2: C1.2 U4.1 | length 2.5
  Top Layer w0.4: C1.2 7.218,6.425 U4.1@9.275,6.425
NetD2_2: D2.2 R5.2 | length 2.8
  Top Layer w0.5: D2.2 56.513,49.487 59.237,49.487 R5.2@59.3,49.55
NetD3_K: D3.K R7.2 | length 2.6
  Top Layer w0.4: D3.K 57.187,42.763 59.212,42.763 R7.2@59.275,42.7
  Top Layer w0.5: R7.2@59.275,42.7 R7.2@59.4,42.7 ; R7.2@59.275,42.7 R7.2@59.4,42.7 ; R7.2@59.275,42.7 R7.2@59.4,42.7 ; R7.2@59.275,42.7 R7.2@59.4,42.7
NetD4_K: D4.K R8.2 | length 2.7
  Top Layer w0.4: D4.K 57.15,37.125 R8.2@59.35,37.125 ; R8.2@59.35,37.125 R8.2@59.4,37.075 ; R8.2@59.35,37.125 R8.2@59.4,37.075 ; R8.2@59.35,37.125 R8.2@59.4,37.075 ; R8.2@59.35,37.125 R8.2@59.4,37.075 ; R8.2@59.35,37.125 R8.2@59.388,37.088 ; R8.2@59.35,37.125 R8.2@59.388,37.087 ; R8.2@59.35,37.125 R8.2@59.388,37.088 ; R8.2@59.388,37.088 R8.2@59.4,37.075 ; R8.2@59.388,37.087 R8.2@59.4,37.075 ; R8.2@59.388,37.088 R8.2@59.4,37.075
NetD5_K: D5.K R9.2 | length 2.5
  Top Layer w0.4: D5.K 57.262,31.513 59.238,31.513 R9.2@59.275,31.475
  Top Layer w0.5: R9.2@59.275,31.475 R9.2@59.4,31.475 ; R9.2@59.275,31.475 R9.2@59.4,31.475 ; R9.2@59.275,31.475 R9.2@59.4,31.475 ; R9.2@59.275,31.475 R9.2@59.4,31.475
NetQ2_1: Q2.1 R16.2 R17.2 | length 37.2
  Top Layer w0.4: R17.2 R17.2@58.1,56 ; Q2.1@58.125,61.325 Q2.1@58.1,61.3 ; R17.2@58.1,56 Q2.1@58.1,61.3 ; R17.2@58.1,56 Q2.1@58.1,61.3 ; R17.2@58.1,56 R16.2@58.1,58.9 ; R17.2@58.1,56 Q2.1@58.1,61.3 ; R17.2@58.1,56 R16.2@58.1,58.9 ; R17.2@58.1,56 Q2.1@58.1,61.3 ; R17.2@58.1,56 R16.2@58.1,58.9 ; R16.2@58.1,58.9 Q2.1@58.1,61.25 ; R16.2@58.1,58.9 Q2.1@58.1,61.25 ; R16.2@58.1,58.9 Q2.1@58.1,61.25 ; Q2.1@58.1,61.25 Q2.1@58.1,61.3 ; Q2.1@58.1,61.25 Q2.1@58.1,61.3 ; Q2.1@58.1,61.25 Q2.1@58.1,61.3
NetQ3_1: Q3.1 R18.2 R20.2 | length 37
  Top Layer w0.4: R20.2 R20.2@53.975,55.975 ; R20.2@53.975,55.975 R18.2@53.975,58.875 ; R20.2@53.975,55.975 Q3.1@53.975,61.175 ; R20.2@53.975,55.975 Q3.1@53.975,61.175 ; R20.2@53.975,55.975 Q3.1@53.975,61.175 ; R20.2@53.975,55.975 R18.2@53.975,58.875 ; R20.2@53.975,55.975 Q3.1@53.975,61.175 ; R20.2@53.975,55.975 R18.2@53.975,58.875 ; R18.2@53.975,58.875 Q3.1@53.975,61.175 ; R18.2@53.975,58.875 Q3.1@53.975,61.175 ; R18.2@53.975,58.875 Q3.1@53.975,61.175 ; Q3.1@53.975,61.175 Q3.1@53.987,61.187 ; Q3.1@53.975,61.175 Q3.1@54.025,61.225 ; Q3.1@53.975,61.175 Q3.1@53.987,61.187 ; Q3.1@53.975,61.175 Q3.1@53.987,61.187 ; Q3.1@53.975,61.175 Q3.1@54.025,61.225 ; Q3.1@53.975,61.175 Q3.1@54.025,61.225 ; Q3.1@53.975,61.175 Q3.1@54.025,61.225 ; Q3.1@53.975,61.175 Q3.1@53.987,61.187 ; Q3.1@53.975,61.175 Q3.1@53.987,61.187 ; Q3.1@53.987,61.187 Q3.1@54.025,61.225 ; Q3.1@53.987,61.187 Q3.1@54.025,61.225 ; Q3.1@53.987,61.187 Q3.1@54.025,61.225
NetR10_1: R10.1 U4.4 | length 4.1
  Top Layer w0.4: U4.4 11.225,8.634 11.32,8.539 11.886,8.539 13.5,6.925 13.5,6.325 R10.1
NetR11_2: R11.2 R12.1 U4.3 | length 14.1
  Top Layer w0.4: U4.3@11.325,6.35 11.7,5.975 R11.2 ; R12.1@8.25,2.675 R11.2@11.7,2.675 ; R12.1@8.25,2.675 R11.2@11.7,2.675 ; R12.1@8.25,2.675 R11.2@11.7,2.675
NetR13_1: R13.1 R15.2 U5.5 | length 12.7
  Top Layer w0.4: U5.5 46.12,8.705 50.05,4.775 R13.1@50.3,4.775 ; R13.1 50.525,4.65 53.7,4.65 R15.2@53.775,4.575
NetR13_2: R13.2 U5.1 U5.2 | length 18.9
  Top Layer w0.4: U5.2 36.85,12.45 U5.1@36.9,12.5 ; U5.2@36.9,11.175 36.97,11.245 38.384,11.245 38.854,10.775 v3(39.125,10.775) ; v3(46.575,6.05) 46.766,5.859 46.766,5.374 47.35,4.791 47.35,4.35 48.925,2.775 R13.2
  Bottom Layer w0.4: v3@39.175,10.675 39.225,10.675 43.85,6.05 v3(46.575,6.05)
NetR22_1: R22.1 R23.2 | length 2.5
  Top Layer w0.4: R23.2 56.975,10.95 R22.1
NetR24_1: R24.1 R25.1 U6.2 | length 10.3
  Top Layer w0.4: R25.1@51.575,16.2 50.4,16.2 49.6,15.4 R24.1@49.6,14.25 ; R25.1@51.775,16.2 52.025,16.45 52.025,16.65 53.69,18.315 U6.2@53.69,19.29 ; R24.1@49.45,14.1 R24.1@49.487,14.137 ; R24.1@49.45,14.1 R24.1@49.6,14.25 ; R24.1@49.45,14.1 R24.1@49.487,14.137 ; R24.1@49.45,14.1 R24.1@49.6,14.25 ; R24.1@49.45,14.1 R24.1@49.6,14.25 ; R24.1@49.45,14.1 R24.1@49.6,14.25 ; R24.1@49.45,14.1 R24.1@49.487,14.137 ; R24.1@49.487,14.137 R24.1@49.6,14.25 ; R24.1@49.487,14.137 R24.1@49.6,14.25 ; R24.1@49.487,14.137 R24.1@49.6,14.25 ; U6.2@53.69,19.29 U6.2@53.757,19.357 ; U6.2@53.69,19.29 U6.2@53.757,19.357 ; U6.2@53.69,19.29 U6.2@53.8,19.4 ; U6.2@53.69,19.29 U6.2@53.757,19.357 ; U6.2@53.69,19.29 U6.2@53.8,19.4 ; U6.2@53.69,19.29 U6.2@53.8,19.4 ; U6.2@53.69,19.29 U6.2@53.8,19.4 ; U6.2@53.69,19.29 U6.2@53.757,19.357 ; U6.2@53.69,19.29 U6.2@53.757,19.357 ; U6.2@53.69,19.29 U6.2@53.757,19.357 ; U6.2@53.757,19.357 U6.2@53.8,19.4 ; U6.2@53.757,19.357 U6.2@53.8,19.4 ; U6.2@53.757,19.357 U6.2@53.8,19.4 ; U6.2@53.757,19.357 U6.2@53.8,19.4 ; U6.2@53.757,19.357 U6.2@53.8,19.4
NetR27_1: R27.1 R28.2 U6.5 | length 5.3
  Top Layer w0.4: U6.5 56.33,24.225 57.58,22.975 R27.1@58.1,22.975 ; R28.2 R27.1@58.575,23 ; R27.1@58.525,23.05 R27.1@58.575,23 ; R27.1@58.525,23.05 R27.1@58.55,23.025 ; R27.1@58.525,23.05 R27.1@58.55,23.025 ; R27.1@58.525,23.05 R27.1@58.575,23 ; R27.1@58.525,23.05 R27.1@58.575,23 ; R27.1@58.525,23.05 R27.1@58.575,23 ; R27.1@58.525,23.05 R27.1@58.55,23.025 ; R27.1@58.55,23.025 R27.1@58.575,23 ; R27.1@58.55,23.025 R27.1@58.575,23 ; R27.1@58.55,23.025 R27.1@58.575,23
  Top Layer w0.5: R27.1@58.1,22.975 R27.1@58.1,23.05 ; R27.1@58.1,22.975 R27.1@58.1,23.05 ; R27.1@58.1,22.975 R27.1@58.1,23.05 ; R27.1@58.1,22.975 R27.1@58.1,23.05
NetU7_3: U7.3 U7.12 U7.13 | length 10.2
  Top Layer w0.4: v1@36.2,32.2 36.263,32.262 36.263,35.513 v2(36.375,35.625)
  Bottom Layer w0.4: U7.13 U7.12@36.365,37.76 ; v1@36.175,32.125 36.267,32.033 36.267,30.257 U7.3 ; v2(36.375,35.625) 36.38,35.63 36.38,37.755 U7.12
  other v1: 36.15,32.225
RC_OUT_1: R29.1 U1.4 U1.9 U1.12 U6.7 | length 49.1
  Top Layer w0.4: v1(36.3,49.425) 36.5,49.425 37.99,50.915 38.19,50.915 v2(38.382,51.107) ; v2(41.487,43.175) 41.525,43.175 44.45,40.25 48.25,40.25 53.35,35.15 53.35,27.3 R29.1 ; R29.1@53.3,27.125 53.3,26.85 53.79,26.36 U6.7 ; U1.9@44.563,52.475 U1.9@44.9,52.475 ; U1.9@44.563,52.475 U1.9@44.9,52.475 ; U1.9@44.563,52.475 U1.9@44.9,52.475
  Bottom Layer w0.4: v1(36.3,49.425) 36.491,49.234 36.491,48.309 U1.4 39.77,44.961 41.487,43.244 v2(41.487,43.175) ; v2(38.382,51.107) 38.19,51.298 38.19,51.69 U1.12 38.955,54.375 43.125,54.375 U1.9@44.8,52.7
RC_Signal: C5.2 D6.2 R22.2 U6.3 U6.6 | length 15.3
  Top Layer w0.4: D6.2 52.375,11.15 54.025,12.8 54.625,12.8 54.775,12.95 R22.2@54.775,13.15 ; R22.2 C5.2@54.875,15.85 ; C5.2@55.035,16.075 U6.3@55.035,19.317 ; U6.3@55.06,19.435 U6.6 ; C5.2@55.2,15.775 C5.2@55.225,15.775 ; C5.2@55.485,15.95 C5.2@55.4,15.95 ; C5.2@55.225,15.775 C5.2@55.337,15.887 ; C5.2@55.225,15.775 C5.2@55.4,15.95 ; C5.2@55.225,15.775 C5.2@55.337,15.887 ; C5.2@55.337,15.887 C5.2@55.4,15.95 ; C5.2@55.337,15.887 C5.2@55.4,15.95
  Top Layer w0.5: C5.2@55.575,15.725 C5.2@55.575,15.775
Relay_IN: J2.5 K1.COM | length 26
  Bottom Layer w1: K1.COM 18.325,65.925 35.975,65.925 J2.5@39.475,62.425
Relay_NC: J2.3 K1.NC | length 19.9
  Bottom Layer w1: K1.NC 41.675,69.525 44.525,66.675 J2.3
Relay_OUT: D2.1 J2.4 K1.NO | length 32.5
  Top Layer w0.4: J2.4 50.65,53.75 50.65,52.275 v1@50.7,52.225
  Bottom Layer w0.4: v1(50.65,52.075) 50.816,51.909 51.526,51.909 D2.1
  Bottom Layer w1: K1.NO 37.975,57.525 41.948,61.498 41.948,62.298 J2.4
Relay_Trigger: D1.2 K1.A2 Q1.3 | length 12.8
  Top Layer w0.4: v2(14.075,61.425) 12.75,62.75 11,62.75 Q1.3 D1.2@10.85,65.55 ; D1.2@10.85,65.55 D1.2@10.875,65.575 ; D1.2@10.85,65.55 D1.2@11.025,65.725 ; D1.2@10.85,65.55 D1.2@10.875,65.575 ; D1.2@10.85,65.55 D1.2@10.875,65.575 ; D1.2@10.875,65.575 D1.2@11.025,65.725 ; D1.2@10.875,65.575 D1.2@11.025,65.725
  Bottom Layer w0.4: v2(14.075,61.425) 14.075,61.4 17.925,57.55 K1.A2
Reset_Button: J1.1 R4.2 R6.2 U3.1 U3.2 U3.4 U3.5 | length 27
  Top Layer w0.4: R6.2@16.85,18.925 R4.2@16.85,21.375 ; R4.2 R4.2@17,21.4 ; R6.2@17.1,18.325 17.1,18.15 18.65,16.6 v2(18.875,16.6) 18.875,16.329 19.25,15.954 19.25,11.971 19.625,11.596 v2(19.625,11.325)
  Top Layer w0.5: R4.2@16.925,21.4 R4.2@17,21.4 ; R4.2@16.85,21.4 R4.2@17,21.4 ; R4.2@16.85,21.4 R4.2@17,21.4 ; R4.2@16.85,21.4 R4.2@17,21.4
  Bottom Layer w0.4: v2(18.875,16.6) 19.789,15.686 20.609,15.686 U3.1 U3.2@23.44,15.39 ; J1.1 19.625,9.65 v2(19.625,11.325) ; U3.2 24.835,14 27.135,14 U3.4 U3.5 U3.5@31.075,15.4
U3A_OUT: U3.3 U3.13 | length 8.6
  Bottom Layer w0.4: U3.13@23.4,22.875 23.475,22.8 23.475,19.725 25.985,17.215 U3.3
U3B_OUT: U3.6 U3.10 | length 8.5
  Bottom Layer w0.4: U3.10@31.125,22.775 31.065,22.715 31.065,20.91 33.605,18.37 U3.6
VG: Q1.1 R1.2 R19.2 | length 15.9
  Top Layer w0.4: Q1.1@9.95,60.525 Q1.1@9.975,60.5 ; R1.2 Q1.1@9.975,60.5 ; R1.2 Q1.1@9.975,60.5 ; R1.2 Q1.1@9.975,60.5
pads on no net: U7.8 U7.9 U7.10 U9.8 U9.9 U9.10 U9.11 U9.12 U9.13

## Polygon pours and split planes (outlines as drawn)
GND on Bottom Layer "NONET_L-01_P-001" (solid, remove dead copper, pour order 0): 0.475,69.975 cw(c2.45,69.975) 2.45,71.95 60.8,71.95 cw(c60.8,69.975) 62.775,69.975 62.775,2.075 cw(c60.75,2.075) 60.75,0.05 2.425,0.05 cw(c2.425,2.025) 0.45,2.025

## Other copper
Top Layer:
  region net NetC1_1: 6.025,7.675 6.025,12.7 7.475,14.15 9.15,14.15 9.6,13.7 9.6,7.675

## Silkscreen, mask and mechanical layers (free items; w line width, h text height)
Top Overlay:
  text "Made by:" at 0.575,63.9 h1.4 r270
  text "FSUK 26" at 36.275,55.975 h1.52
  text "Mohamed Keshk / Belal Hassan" at 0.8,51.55 h1.4 r270
  text "PWR" at 49.4,42.125 h1.52
  text "IMD" at 50.5,36.2 h1.52
  text "AMS" at 49.8,30.65 h1.52
  text "LATCH_v3" at 30.39,26.575 h1.5
  text "Energy  / lives  / here" at 3.475,20.325 h1
Bottom Overlay:
  drawing of 55 lines, arcs and shapes, not listed
  text "+5V" at 36.75,64.275 h1.52 r270
  text "RELAY IN" at 38.95,64.275 h1.52 r270
  text "RELAY OUT" at 41.375,64.275 h1.52 r270
  text "Relay NC" at 43.95,64.275 h1.52 r270
  text "AMS" at 46.775,64.275 h1.52 r270
  text "IMD" at 49.2,64.275 h1.52 r270
  text "RESET BTN" at 19.05,0.675 h1.52 r270
  text "BTN GND" at 21.425,0.675 h1.52 r270
  text "AMS" at 23.975,0.675 h1.52 r270
  text "IMD" at 26.4,0.675 h1.52 r270
  text "+12V" at 29.25,0.675 h1.52 r270
  text "GND" at 31.375,0.675 h1.52 r270
Mechanical 1:
  lines w1: -0.025,2.065 ccw(c2.515,2.065) 2.515,-0.475 60.735,-0.475 ccw(c60.735,2.065) 63.275,2.065 63.275,69.885 ccw(c60.735,69.885) 60.735,72.425 2.515,72.425 ccw(c2.515,69.885) -0.025,69.885 -0.025,2.065

## Text inside footprints (layer, text, board x,y; h text height)
C8: Top Overlay "+" at 36.15,4.475 h1.22 r180
D3: Mechanical 13 "+" at 54.458,41.775 h1 r180
D4: Mechanical 13 "+" at 54.408,36.15 h1 r180
D5: Mechanical 13 "+" at 54.533,30.525 h1 r180